# Altium PCB ServoShield.PcbDoc (part 3 of 3)
Units mm, origin at the board's own origin, x right, y up, seen from the top; angles counter-clockwise.
Board outline 82.5 x 82.5 mm, 2 copper layers (Top Layer, Bottom Layer); 43 components, 112 nets, 281 pads, 5423 vias.
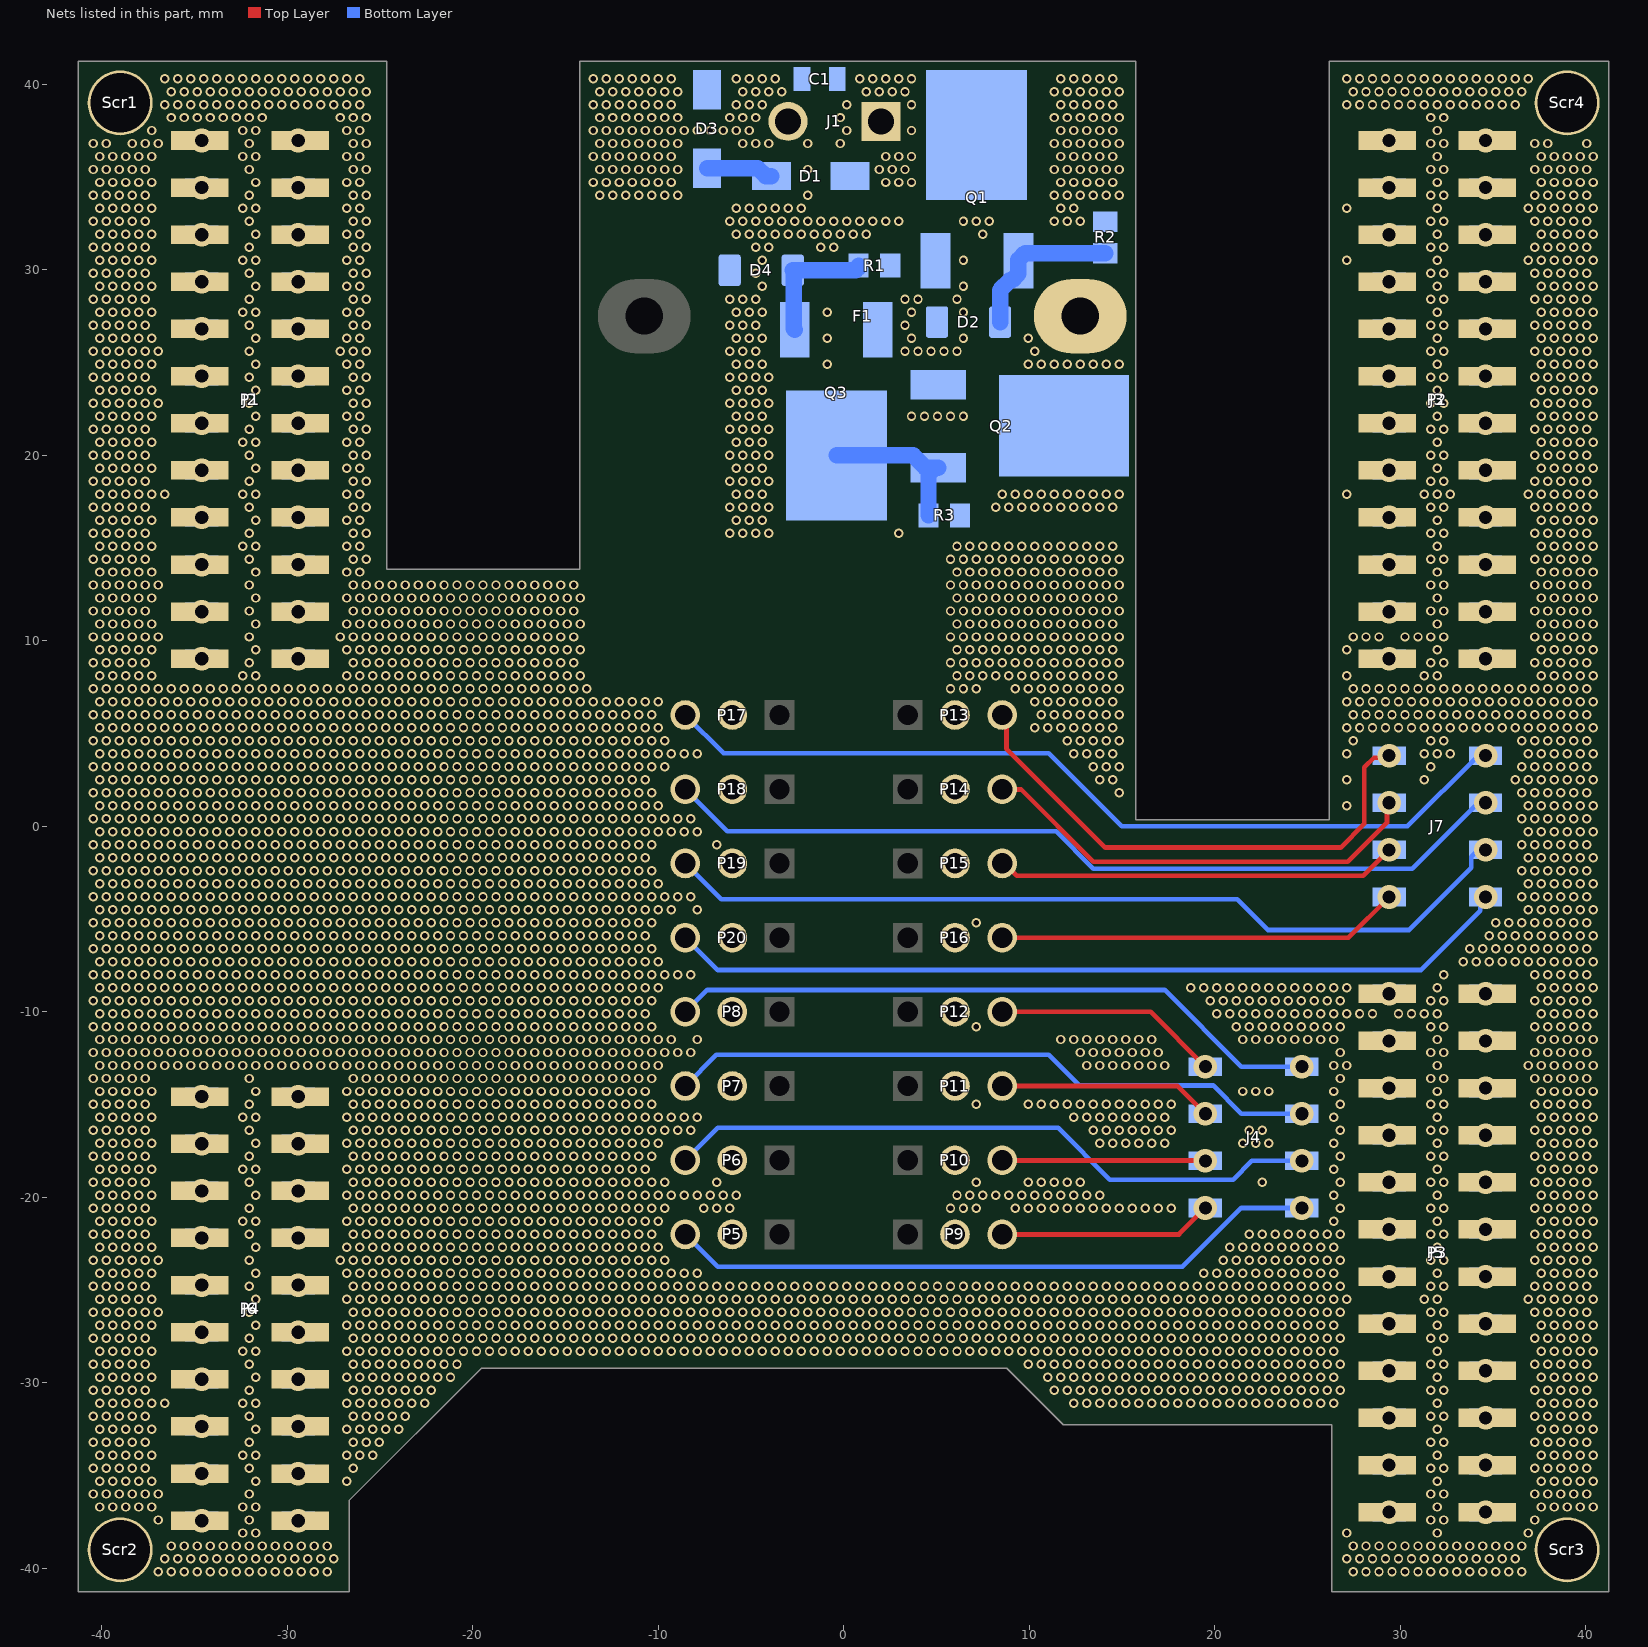
[diagram p3: the nets of this part, all layers, seen from the top]

## Via types
v1: diameter 0.508, hole 0.3, Top Layer to Bottom Layer, tented both sides, 5315 vias
v2: diameter 1.27, hole 0.711, Top Layer to Bottom Layer, 108 vias

## Nets (pads, with @x,y where several pads share a name; then routed paths per layer and width w, separated by ;. In a path a pad name is that pad's centre, name@x,y a point inside that pad or via, vN(x,y) a via of type N, cw(c..) or ccw(c..) an arc to the next point about the centre after c; other vN are vias at no path point) (continued)
GND: (continued)
  other v1: 29.207,5.307 29.907,5.307 30.607,5.307 31.307,5.307 32.007,5.307 32.707,5.307 33.407,5.307 34.107,5.307 34.807,5.307 35.507,5.307 36.207,5.307 36.907,5.307 37.607,5.307 38.307,5.307 39.007,5.307 39.707,5.307 40.407,5.307 -40.443,6.007 -39.743,6.007 -39.043,6.007 -38.343,6.007 -37.643,6.007 -36.943,6.007 -36.243,6.007 -35.543,6.007 -34.843,6.007 -34.143,6.007 -33.443,6.007 -32.743,6.007 -32.043,6.007 -31.343,6.007 -30.643,6.007 -29.943,6.007 -29.243,6.007 -28.543,6.007 -27.843,6.007 -27.143,6.007 -26.443,6.007 -25.743,6.007 -25.043,6.007 -24.343,6.007 -23.643,6.007 -22.943,6.007 -22.243,6.007 -21.543,6.007 -20.843,6.007 -20.143,6.007 -19.443,6.007 -18.743,6.007 -18.043,6.007 -17.343,6.007 -16.643,6.007 -15.943,6.007 -15.243,6.007 -14.543,6.007 -13.843,6.007 -13.143,6.007 -12.443,6.007 -11.743,6.007 -11.043,6.007 -10.343,6.007 10.657,6.007 11.357,6.007 12.057,6.007 12.757,6.007 13.457,6.007 14.157,6.007 14.857,6.007 27.457,6.007 28.157,6.007 28.857,6.007 29.557,6.007 30.257,6.007 30.957,6.007 31.657,6.007 32.357,6.007 33.057,6.007 33.757,6.007 34.457,6.007 35.157,6.007 35.857,6.007 36.557,6.007 37.257,6.007 37.957,6.007 38.657,6.007 39.357,6.007 40.057,6.007 -40.093,6.707 -39.393,6.707 -38.693,6.707 -37.993,6.707 -37.293,6.707 -36.593,6.707 -35.893,6.707 -35.193,6.707 -34.493,6.707 -33.793,6.707 -33.093,6.707 -32.393,6.707 -31.693,6.707 -30.993,6.707 -30.293,6.707 -29.593,6.707 -28.893,6.707 -28.193,6.707 -27.493,6.707 -26.793,6.707 -26.093,6.707 -25.393,6.707 -24.693,6.707 -23.993,6.707 -23.293,6.707 -22.593,6.707 -21.893,6.707 -21.193,6.707 -20.493,6.707 -19.793,6.707 -19.093,6.707 -18.393,6.707 -17.693,6.707 -16.993,6.707 -16.293,6.707 -15.593,6.707 -14.893,6.707 -14.193,6.707 -13.493,6.707 -12.793,6.707 -12.093,6.707 -11.393,6.707 -10.693,6.707 -9.993,6.707 10.307,6.707 11.007,6.707 11.707,6.707 12.407,6.707 13.107,6.707 13.807,6.707 14.507,6.707 27.107,6.707 27.807,6.707 28.507,6.707 29.207,6.707 29.907,6.707 30.607,6.707 31.307,6.707 32.007,6.707 32.707,6.707 33.407,6.707 34.107,6.707 34.807,6.707 35.507,6.707 36.207,6.707 36.907,6.707 37.607,6.707 38.307,6.707 39.007,6.707 39.707,6.707 40.407,6.707 -40.443,7.407 -39.743,7.407 -39.043,7.407 -38.343,7.407 -37.643,7.407 -36.943,7.407 -36.243,7.407 -35.543,7.407 -34.843,7.407 -34.143,7.407 -33.443,7.407 -32.743,7.407 -32.043,7.407 -31.343,7.407 -30.643,7.407 -29.943,7.407 -29.243,7.407 -28.543,7.407 -27.843,7.407 -27.143,7.407 -26.443,7.407 -25.743,7.407 -25.043,7.407 -24.343,7.407 -23.643,7.407 -22.943,7.407 -22.243,7.407 -21.543,7.407 -20.843,7.407 -20.143,7.407 -19.443,7.407 -18.743,7.407 -18.043,7.407 -17.343,7.407 -16.643,7.407 -15.943,7.407 -15.243,7.407 -14.543,7.407 -13.843,7.407 5.757,7.407 6.457,7.407 7.157,7.407 9.257,7.407 9.957,7.407 10.657,7.407 11.357,7.407 12.057,7.407 12.757,7.407 13.457,7.407 14.157,7.407 14.857,7.407 27.457,7.407 28.157,7.407 28.857,7.407 29.557,7.407 30.257,7.407 30.957,7.407 31.657,7.407 32.357,7.407 33.057,7.407 33.757,7.407 34.457,7.407 35.157,7.407 35.857,7.407 36.557,7.407 37.257,7.407 37.957,7.407 38.657,7.407 39.357,7.407 40.057,7.407 -40.093,8.107 -39.393,8.107 -38.693,8.107 -37.993,8.107 -37.293,8.107 -32.393,8.107 -31.693,8.107 -26.793,8.107 -26.093,8.107 -25.393,8.107 -24.693,8.107 -23.993,8.107 -23.293,8.107 -22.593,8.107 -21.893,8.107 -21.193,8.107 -20.493,8.107 -19.793,8.107 -19.093,8.107 -18.393,8.107 -17.693,8.107 -16.993,8.107 -16.293,8.107 -15.593,8.107 -14.893,8.107 -14.193,8.107 6.107,8.107 6.807,8.107 7.507,8.107 8.207,8.107 8.907,8.107 9.607,8.107 10.307,8.107 11.007,8.107 11.707,8.107 12.407,8.107 13.107,8.107 13.807,8.107 14.507,8.107 27.107,8.107 31.307,8.107 32.007,8.107 37.607,8.107 38.307,8.107 39.007,8.107 39.707,8.107 40.407,8.107 -40.443,8.807 -39.743,8.807 -39.043,8.807 -38.343,8.807 -37.643,8.807 -32.043,8.807 -26.443,8.807 -25.743,8.807 -25.043,8.807 -24.343,8.807 -23.643,8.807 -22.943,8.807 -22.243,8.807 -21.543,8.807 -20.843,8.807 -20.143,8.807 -19.443,8.807 -18.743,8.807 -18.043,8.807 -17.343,8.807 -16.643,8.807 -15.943,8.807 -15.243,8.807 -14.543,8.807 5.757,8.807 6.457,8.807 7.157,8.807 7.857,8.807 8.557,8.807 9.257,8.807 9.957,8.807 10.657,8.807 11.357,8.807 12.057,8.807 12.757,8.807 13.457,8.807 14.157,8.807 14.857,8.807 31.657,8.807 32.357,8.807 37.257,8.807 37.957,8.807 38.657,8.807 39.357,8.807 40.057,8.807 -40.093,9.507 -39.393,9.507 -38.693,9.507 -37.993,9.507 -37.293,9.507 -31.693,9.507 -26.793,9.507 -26.093,9.507 -25.393,9.507 -24.693,9.507 -23.993,9.507 -23.293,9.507 -22.593,9.507 -21.893,9.507 -21.193,9.507 -20.493,9.507 -19.793,9.507 -19.093,9.507 -18.393,9.507 -17.693,9.507 -16.993,9.507 -16.293,9.507 -15.593,9.507 -14.893,9.507 -14.193,9.507 6.107,9.507 6.807,9.507 7.507,9.507 8.207,9.507 8.907,9.507 9.607,9.507 10.307,9.507 11.007,9.507 11.707,9.507 12.407,9.507 13.107,9.507 13.807,9.507 14.507,9.507 27.107,9.507 32.007,9.507 37.607,9.507 38.307,9.507 39.007,9.507 39.707,9.507 40.407,9.507 -40.443,10.207 -39.743,10.207 -39.043,10.207 -38.343,10.207 -37.643,10.207 -36.943,10.207 -32.043,10.207 -27.143,10.207 -26.443,10.207 -25.743,10.207 -25.043,10.207 -24.343,10.207 -23.643,10.207 -22.943,10.207 -22.243,10.207 -21.543,10.207 -20.843,10.207 -20.143,10.207 -19.443,10.207 -18.743,10.207 -18.043,10.207 -17.343,10.207 -16.643,10.207 -15.943,10.207 -15.243,10.207 -14.543,10.207 5.757,10.207 6.457,10.207 7.157,10.207 7.857,10.207 8.557,10.207 9.257,10.207 9.957,10.207 10.657,10.207 11.357,10.207 12.057,10.207 12.757,10.207 13.457,10.207 14.157,10.207 14.857,10.207 27.457,10.207 28.157,10.207 28.857,10.207 30.257,10.207 30.957,10.207 31.657,10.207 32.357,10.207 37.257,10.207 37.957,10.207 38.657,10.207 39.357,10.207 40.057,10.207 -40.093,10.907 -39.393,10.907 -38.693,10.907 -37.993,10.907 -37.293,10.907 -31.693,10.907 -26.793,10.907 -26.093,10.907 -25.393,10.907 -24.693,10.907 -23.993,10.907 -23.293,10.907 -22.593,10.907 -21.893,10.907 -21.193,10.907 -20.493,10.907 -19.793,10.907 -19.093,10.907 -18.393,10.907 -17.693,10.907 -16.993,10.907 -16.293,10.907 -15.593,10.907 -14.893,10.907 -14.193,10.907 6.107,10.907 6.807,10.907 7.507,10.907 8.207,10.907 8.907,10.907 9.607,10.907 10.307,10.907 11.007,10.907 11.707,10.907 12.407,10.907 13.107,10.907 13.807,10.907 14.507,10.907 32.007,10.907 37.607,10.907 38.307,10.907 39.007,10.907 39.707,10.907 40.407,10.907 -40.443,11.607 -39.743,11.607 -39.043,11.607 -38.343,11.607 -37.643,11.607 -32.043,11.607 -26.443,11.607 -25.743,11.607 -25.043,11.607 -24.343,11.607 -23.643,11.607 -22.943,11.607 -22.243,11.607 -21.543,11.607 -20.843,11.607 -20.143,11.607 -19.443,11.607 -18.743,11.607 -18.043,11.607 -17.343,11.607 -16.643,11.607 -15.943,11.607 -15.243,11.607 -14.543,11.607 5.757,11.607 6.457,11.607 7.157,11.607 7.857,11.607 8.557,11.607 9.257,11.607 9.957,11.607 10.657,11.607 11.357,11.607 12.057,11.607 12.757,11.607 13.457,11.607 14.157,11.607 14.857,11.607 31.657,11.607 32.357,11.607 37.257,11.607 37.957,11.607 38.657,11.607 39.357,11.607 40.057,11.607 -40.093,12.307 -39.393,12.307 -38.693,12.307 -37.993,12.307 -37.293,12.307 -31.693,12.307 -26.793,12.307 -26.093,12.307 -25.393,12.307 -24.693,12.307 -23.993,12.307 -23.293,12.307 -22.593,12.307 -21.893,12.307 -21.193,12.307 -20.493,12.307 -19.793,12.307 -19.093,12.307 -18.393,12.307 -17.693,12.307 -16.993,12.307 -16.293,12.307 -15.593,12.307 -14.893,12.307 -14.193,12.307 6.107,12.307 6.807,12.307 7.507,12.307 8.207,12.307 8.907,12.307 9.607,12.307 10.307,12.307 11.007,12.307 11.707,12.307 12.407,12.307 13.107,12.307 13.807,12.307 14.507,12.307 32.007,12.307 37.607,12.307 38.307,12.307 39.007,12.307 39.707,12.307 40.407,12.307 -40.443,13.007 -39.743,13.007 -39.043,13.007 -38.343,13.007 -37.643,13.007 -36.943,13.007 -32.043,13.007 -26.443,13.007 -25.743,13.007 -25.043,13.007 -24.343,13.007 -23.643,13.007 -22.943,13.007 -22.243,13.007 -21.543,13.007 -20.843,13.007 -20.143,13.007 -19.443,13.007 -18.743,13.007 -18.043,13.007 -17.343,13.007 -16.643,13.007 -15.943,13.007 -15.243,13.007 -14.543,13.007 5.757,13.007 6.457,13.007 7.157,13.007 7.857,13.007 8.557,13.007 9.257,13.007 9.957,13.007 10.657,13.007 11.357,13.007 12.057,13.007 12.757,13.007 13.457,13.007 14.157,13.007 14.857,13.007 31.657,13.007 32.357,13.007 37.257,13.007 37.957,13.007 38.657,13.007 39.357,13.007 40.057,13.007 -40.093,13.707 -39.393,13.707 -38.693,13.707 -37.993,13.707 -37.293,13.707 -31.693,13.707 -26.793,13.707 -26.093,13.707 6.107,13.707 6.807,13.707 7.507,13.707 8.207,13.707 8.907,13.707 9.607,13.707 10.307,13.707 11.007,13.707 11.707,13.707 12.407,13.707 13.107,13.707 13.807,13.707 14.507,13.707 32.007,13.707 37.607,13.707 38.307,13.707 39.007,13.707 39.707,13.707 40.407,13.707 -40.443,14.407 -39.743,14.407 -39.043,14.407 -38.343,14.407 -37.643,14.407 -32.043,14.407 -26.443,14.407 -25.743,14.407 5.757,14.407 6.457,14.407 7.157,14.407 7.857,14.407 8.557,14.407 9.257,14.407 9.957,14.407 10.657,14.407 11.357,14.407 12.057,14.407 12.757,14.407 13.457,14.407 14.157,14.407 14.857,14.407 31.657,14.407 32.357,14.407 37.257,14.407 37.957,14.407 38.657,14.407 39.357,14.407 40.057,14.407 -40.093,15.107 -39.393,15.107 -38.693,15.107 -37.993,15.107 -37.293,15.107 -32.393,15.107 -31.693,15.107 -26.793,15.107 -26.093,15.107 6.107,15.107 6.807,15.107 7.507,15.107 8.207,15.107 8.907,15.107 9.607,15.107 10.307,15.107 11.007,15.107 11.707,15.107 12.407,15.107 13.107,15.107 13.807,15.107 14.507,15.107 32.007,15.107 37.607,15.107 38.307,15.107 39.007,15.107 39.707,15.107 40.407,15.107 -40.443,15.807 -39.743,15.807 -39.043,15.807 -38.343,15.807 -37.643,15.807 -32.043,15.807 -26.443,15.807 -25.743,15.807 -6.143,15.807 -5.443,15.807 -4.743,15.807 -4.043,15.807 2.957,15.807 31.657,15.807 32.357,15.807 37.257,15.807 37.957,15.807 38.657,15.807 39.357,15.807 40.057,15.807 -40.093,16.507 -39.393,16.507 -38.693,16.507 -37.993,16.507 -37.293,16.507 -31.693,16.507 -26.793,16.507 -26.093,16.507 -5.793,16.507 -5.093,16.507 -4.393,16.507 32.007,16.507 37.607,16.507 38.307,16.507 39.007,16.507 39.707,16.507 40.407,16.507 -40.443,17.207 -39.743,17.207 -39.043,17.207 -38.343,17.207 -37.643,17.207 -32.043,17.207 -26.443,17.207 -25.743,17.207 -6.143,17.207 -5.443,17.207 -4.743,17.207 -4.043,17.207 31.657,17.207 32.357,17.207 37.257,17.207 37.957,17.207 38.657,17.207 39.357,17.207 40.057,17.207 -40.093,17.907 -39.393,17.907 -38.693,17.907 -37.993,17.907 -37.293,17.907 -36.593,17.907 -32.393,17.907 -31.693,17.907 -26.793,17.907 -26.093,17.907 -5.793,17.907 -5.093,17.907 -4.393,17.907 27.107,17.907 31.307,17.907 32.007,17.907 32.707,17.907 36.907,17.907 37.607,17.907 38.307,17.907 39.007,17.907 39.707,17.907 40.407,17.907 -40.443,18.607 -39.743,18.607 -39.043,18.607 -38.343,18.607 -37.643,18.607 -32.043,18.607 -26.443,18.607 -25.743,18.607 -6.143,18.607 -5.443,18.607 -4.743,18.607 -4.043,18.607 31.657,18.607 32.357,18.607 37.257,18.607 37.957,18.607 38.657,18.607 39.357,18.607 40.057,18.607 -40.093,19.307 -39.393,19.307 -38.693,19.307 -37.993,19.307 -37.293,19.307 -31.693,19.307 -26.793,19.307 -26.093,19.307 -5.793,19.307 -5.093,19.307 -4.393,19.307 32.007,19.307 37.607,19.307 38.307,19.307 39.007,19.307 39.707,19.307 40.407,19.307 -40.443,20.007 -39.743,20.007 -39.043,20.007 -38.343,20.007 -37.643,20.007 -32.043,20.007 -26.443,20.007 -25.743,20.007 -6.143,20.007 -5.443,20.007 -4.743,20.007 -4.043,20.007 31.657,20.007 32.357,20.007 37.257,20.007 37.957,20.007 38.657,20.007 39.357,20.007 40.057,20.007 -40.093,20.707 -39.393,20.707 -38.693,20.707 -37.993,20.707 -37.293,20.707 -32.393,20.707 -31.693,20.707 -26.793,20.707 -26.093,20.707 -5.793,20.707 -5.093,20.707 -4.393,20.707 32.007,20.707 37.607,20.707 38.307,20.707 39.007,20.707 39.707,20.707 40.407,20.707 -40.443,21.407 -39.743,21.407 -39.043,21.407 -38.343,21.407 -37.643,21.407 -32.043,21.407 -26.443,21.407 -25.743,21.407 -6.143,21.407 -5.443,21.407 -4.743,21.407 -4.043,21.407 31.657,21.407 32.357,21.407 37.257,21.407 37.957,21.407 38.657,21.407 39.357,21.407 40.057,21.407 -40.093,22.107 -39.393,22.107 -38.693,22.107 -37.993,22.107 -37.293,22.107 -31.693,22.107 -26.793,22.107 -26.093,22.107 -5.793,22.107 -5.093,22.107 -4.393,22.107 32.007,22.107 37.607,22.107 38.307,22.107 39.007,22.107 39.707,22.107 40.407,22.107 -40.443,22.807 -39.743,22.807 -39.043,22.807 -38.343,22.807 -37.643,22.807 -36.943,22.807 -32.043,22.807 -26.443,22.807 -25.743,22.807 -6.143,22.807 -5.443,22.807 -4.743,22.807 -4.043,22.807 31.657,22.807 32.357,22.807 37.257,22.807 37.957,22.807 38.657,22.807 39.357,22.807 40.057,22.807 -40.093,23.507 -39.393,23.507 -38.693,23.507 -37.993,23.507 -37.293,23.507 -31.693,23.507 -26.793,23.507 -26.093,23.507 -5.793,23.507 -5.093,23.507 -4.393,23.507 32.007,23.507 37.607,23.507 38.307,23.507 39.007,23.507 39.707,23.507 40.407,23.507 -40.443,24.207 -39.743,24.207 -39.043,24.207 -38.343,24.207 -37.643,24.207 -32.043,24.207 -26.443,24.207 -25.743,24.207 -6.143,24.207 -5.443,24.207 -4.743,24.207 -4.043,24.207 31.657,24.207 32.357,24.207 37.257,24.207 37.957,24.207 38.657,24.207 39.357,24.207 40.057,24.207 -40.093,24.907 -39.393,24.907 -38.693,24.907 -37.993,24.907 -37.293,24.907 -31.693,24.907 -26.793,24.907 -26.093,24.907 -5.793,24.907 -5.093,24.907 -4.393,24.907 -0.893,24.907 32.007,24.907 37.607,24.907 38.307,24.907 39.007,24.907 39.707,24.907 40.407,24.907 -40.443,25.607 -39.743,25.607 -39.043,25.607 -38.343,25.607 -37.643,25.607 -36.943,25.607 -32.043,25.607 -27.143,25.607 -26.443,25.607 -25.743,25.607 -6.143,25.607 -5.443,25.607 -4.743,25.607 31.657,25.607 32.357,25.607 37.257,25.607 37.957,25.607 38.657,25.607 39.357,25.607 40.057,25.607 -40.093,26.307 -39.393,26.307 -38.693,26.307 -37.993,26.307 -37.293,26.307 -31.693,26.307 -26.793,26.307 -26.093,26.307 -5.793,26.307 -5.093,26.307 -4.393,26.307 -0.893,26.307 32.007,26.307 37.607,26.307 38.307,26.307 39.007,26.307 39.707,26.307 40.407,26.307 -40.443,27.007 -39.743,27.007 -39.043,27.007 -38.343,27.007 -37.643,27.007 -32.043,27.007 -26.443,27.007 -25.743,27.007 -6.143,27.007 -5.443,27.007 -4.743,27.007 31.657,27.007 32.357,27.007 37.257,27.007 37.957,27.007 38.657,27.007 39.357,27.007 40.057,27.007 -40.093,27.707 -39.393,27.707 -38.693,27.707 -37.993,27.707 -37.293,27.707 -32.393,27.707 -31.693,27.707 -26.793,27.707 -26.093,27.707 -5.793,27.707 -5.093,27.707 -4.393,27.707 -0.893,27.707 32.007,27.707 37.607,27.707 38.307,27.707 39.007,27.707 39.707,27.707 40.407,27.707 -40.443,28.407 -39.743,28.407 -39.043,28.407 -38.343,28.407 -37.643,28.407 -32.043,28.407 -26.443,28.407 -25.743,28.407 -6.143,28.407 -5.443,28.407 -4.743,28.407 31.657,28.407 32.357,28.407 37.257,28.407 37.957,28.407 38.657,28.407 39.357,28.407 40.057,28.407 -40.093,29.107 -39.393,29.107 -38.693,29.107 -37.993,29.107 -37.293,29.107 -31.693,29.107 -26.793,29.107 -26.093,29.107 -4.393,29.107 32.007,29.107 37.607,29.107 38.307,29.107 39.007,29.107 39.707,29.107 40.407,29.107 -40.443,29.807 -39.743,29.807 -39.043,29.807 -38.343,29.807 -37.643,29.807 -32.043,29.807 -26.443,29.807 -25.743,29.807 -4.743,29.807 31.657,29.807 32.357,29.807 37.257,29.807 37.957,29.807 38.657,29.807 39.357,29.807 40.057,29.807 -40.093,30.507 -39.393,30.507 -38.693,30.507 -37.993,30.507 -37.293,30.507 -32.393,30.507 -31.693,30.507 -26.793,30.507 -26.093,30.507 -4.393,30.507 27.107,30.507 32.007,30.507 36.907,30.507 37.607,30.507 38.307,30.507 39.007,30.507 39.707,30.507 40.407,30.507 -40.443,31.207 -39.743,31.207 -39.043,31.207 -38.343,31.207 -37.643,31.207 -32.043,31.207 -26.443,31.207 -25.743,31.207 -4.743,31.207 -4.043,31.207 -1.243,31.207 -0.543,31.207 31.657,31.207 32.357,31.207 37.257,31.207 37.957,31.207 38.657,31.207 39.357,31.207 40.057,31.207 -40.093,31.907 -39.393,31.907 -38.693,31.907 -37.993,31.907 -37.293,31.907 -31.693,31.907 -26.793,31.907 -26.093,31.907 -5.793,31.907 -5.093,31.907 -4.393,31.907 -3.693,31.907 -2.993,31.907 -2.293,31.907 -1.593,31.907 -0.893,31.907 -0.193,31.907 0.507,31.907 1.207,31.907 7.507,31.907 32.007,31.907 37.607,31.907 38.307,31.907 39.007,31.907 39.707,31.907 40.407,31.907 -40.443,32.607 -39.743,32.607 -39.043,32.607 -38.343,32.607 -37.643,32.607 -32.043,32.607 -26.443,32.607 -25.743,32.607 -6.143,32.607 -5.443,32.607 -4.743,32.607 -4.043,32.607 -3.343,32.607 -2.643,32.607 -1.943,32.607 -1.243,32.607 -0.543,32.607 0.157,32.607 0.857,32.607 1.557,32.607 2.257,32.607 2.957,32.607 6.457,32.607 7.157,32.607 7.857,32.607 11.357,32.607 12.057,32.607 12.757,32.607 31.657,32.607 32.357,32.607 37.257,32.607 37.957,32.607 38.657,32.607 39.357,32.607 40.057,32.607 -40.093,33.307 -39.393,33.307 -38.693,33.307 -37.993,33.307 -37.293,33.307 -32.393,33.307 -31.693,33.307 -26.793,33.307 -26.093,33.307 -5.793,33.307 -5.093,33.307 -4.393,33.307 -3.693,33.307 -2.993,33.307 -2.293,33.307 11.707,33.307 12.407,33.307 27.107,33.307 32.007,33.307 36.907,33.307 37.607,33.307 38.307,33.307 39.007,33.307 39.707,33.307 40.407,33.307 -40.443,34.007 -39.743,34.007 -39.043,34.007 -38.343,34.007 -37.643,34.007 -32.043,34.007 -26.443,34.007 -25.743,34.007 -13.143,34.007 -12.443,34.007 -11.743,34.007 -11.043,34.007 -10.343,34.007 -9.643,34.007 -8.943,34.007 -1.943,34.007 11.357,34.007 12.057,34.007 12.757,34.007 13.457,34.007 14.157,34.007 14.857,34.007 31.657,34.007 32.357,34.007 37.257,34.007 37.957,34.007 38.657,34.007 39.357,34.007 40.057,34.007 -40.093,34.707 -39.393,34.707 -38.693,34.707 -37.993,34.707 -37.293,34.707 -31.693,34.707 -26.793,34.707 -26.093,34.707 -13.493,34.707 -12.793,34.707 -12.093,34.707 -11.393,34.707 -10.693,34.707 -9.993,34.707 -9.293,34.707 11.707,34.707 12.407,34.707 13.107,34.707 13.807,34.707 14.507,34.707 32.007,34.707 37.607,34.707 38.307,34.707 39.007,34.707 39.707,34.707 40.407,34.707 -40.443,35.407 -39.743,35.407 -39.043,35.407 -38.343,35.407 -37.643,35.407 -32.043,35.407 -26.443,35.407 -25.743,35.407 -13.143,35.407 -12.443,35.407 -11.743,35.407 -11.043,35.407 -10.343,35.407 -9.643,35.407 -8.943,35.407 -1.943,35.407 11.357,35.407 12.057,35.407 12.757,35.407 13.457,35.407 14.157,35.407 14.857,35.407 31.657,35.407 32.357,35.407 37.257,35.407 37.957,35.407 38.657,35.407 39.357,35.407 40.057,35.407 -40.093,36.107 -39.393,36.107 -38.693,36.107 -37.993,36.107 -37.293,36.107 -32.393,36.107 -31.693,36.107 -26.793,36.107 -26.093,36.107 -13.493,36.107 -12.793,36.107 -12.093,36.107 -11.393,36.107 -10.693,36.107 -9.993,36.107 -9.293,36.107 11.707,36.107 12.407,36.107 13.107,36.107 13.807,36.107 14.507,36.107 32.007,36.107 37.607,36.107 38.307,36.107 39.007,36.107 39.707,36.107 40.407,36.107 -40.443,36.807 -39.743,36.807 -38.343,36.807 -37.643,36.807 -36.943,36.807 -32.043,36.807 -26.443,36.807 -25.743,36.807 -13.143,36.807 -12.443,36.807 -11.743,36.807 -11.043,36.807 -10.343,36.807 -9.643,36.807 -8.943,36.807 -5.443,36.807 -4.743,36.807 -4.043,36.807 -1.943,36.807 11.357,36.807 12.057,36.807 12.757,36.807 13.457,36.807 14.157,36.807 14.857,36.807 31.657,36.807 32.357,36.807 37.257,36.807 37.957,36.807 40.057,36.807 -37.293,37.507 -32.393,37.507 -31.693,37.507 -26.793,37.507 -26.093,37.507 -13.493,37.507 -12.793,37.507 -12.093,37.507 -11.393,37.507 -10.693,37.507 -9.993,37.507 -9.293,37.507 -8.593,37.507 -7.893,37.507 -7.193,37.507 -6.493,37.507 -5.793,37.507 -5.093,37.507 11.707,37.507 12.407,37.507 13.107,37.507 13.807,37.507 14.507,37.507 32.007,37.507 -36.243,38.207 -35.543,38.207 -34.843,38.207 -34.143,38.207 -33.443,38.207 -32.743,38.207 -32.043,38.207 -31.343,38.207 -27.143,38.207 -26.443,38.207 -25.743,38.207 -13.143,38.207 -12.443,38.207 -11.743,38.207 -11.043,38.207 -10.343,38.207 -9.643,38.207 -8.943,38.207 -6.143,38.207 -5.443,38.207 -4.743,38.207 11.357,38.207 12.057,38.207 12.757,38.207 13.457,38.207 14.157,38.207 14.857,38.207 31.657,38.207 32.357,38.207 -36.593,38.907 -35.893,38.907 -35.193,38.907 -34.493,38.907 -33.793,38.907 -33.093,38.907 -32.393,38.907 -31.693,38.907 -30.993,38.907 -30.293,38.907 -29.593,38.907 -28.893,38.907 -28.193,38.907 -27.493,38.907 -26.793,38.907 -26.093,38.907 -13.493,38.907 -12.793,38.907 -12.093,38.907 -11.393,38.907 -10.693,38.907 -9.993,38.907 -9.293,38.907 -5.793,38.907 -5.093,38.907 -4.393,38.907 11.707,38.907 12.407,38.907 13.107,38.907 13.807,38.907 14.507,38.907 27.107,38.907 27.807,38.907 28.507,38.907 29.207,38.907 29.907,38.907 30.607,38.907 31.307,38.907 32.007,38.907 32.707,38.907 33.407,38.907 34.107,38.907 34.807,38.907 35.507,38.907 36.207,38.907 -36.243,39.607 -35.543,39.607 -34.843,39.607 -34.143,39.607 -33.443,39.607 -32.743,39.607 -32.043,39.607 -31.343,39.607 -30.643,39.607 -29.943,39.607 -29.243,39.607 -28.543,39.607 -27.843,39.607 -27.143,39.607 -26.443,39.607 -25.743,39.607 -13.143,39.607 -12.443,39.607 -11.743,39.607 -11.043,39.607 -10.343,39.607 -9.643,39.607 -8.943,39.607 -5.443,39.607 -4.743,39.607 -4.043,39.607 -3.343,39.607 11.357,39.607 12.057,39.607 12.757,39.607 13.457,39.607 14.157,39.607 14.857,39.607 27.457,39.607 28.157,39.607 28.857,39.607 29.557,39.607 30.257,39.607 30.957,39.607 31.657,39.607 32.357,39.607 33.057,39.607 33.757,39.607 34.457,39.607 35.157,39.607 35.857,39.607 36.557,39.607 -36.593,40.307 -35.893,40.307 -35.193,40.307 -34.493,40.307 -33.793,40.307 -33.093,40.307 -32.393,40.307 -31.693,40.307 -30.993,40.307 -30.293,40.307 -29.593,40.307 -28.893,40.307 -28.193,40.307 -27.493,40.307 -26.793,40.307 -26.093,40.307 -13.493,40.307 -12.793,40.307 -12.093,40.307 -11.393,40.307 -10.693,40.307 -9.993,40.307 -9.293,40.307 -5.793,40.307 -5.093,40.307 -4.393,40.307 -3.693,40.307 11.707,40.307 12.407,40.307 13.107,40.307 13.807,40.307 14.507,40.307 27.107,40.307 27.807,40.307 28.507,40.307 29.207,40.307 29.907,40.307 30.607,40.307 31.307,40.307 32.007,40.307 32.707,40.307 33.407,40.307 34.107,40.307 34.807,40.307 35.507,40.307 36.207,40.307 36.907,40.307
  other v2: -34.6,-37.43 -29.4,-37.43 29.4,-9.03 29.4,9.03 -34.6,36.97
HD_3V3: J5.2 P3.1
  other v2: 34.6,-36.97
HD_3V3-1: J5.1 P3.2
  other v2: 29.4,-36.97
HD_5V-1: J2.24 P1.23
  other v2: -29.4,36.97
HD_5V-2: J6.1 P4.2
  other v2: -29.4,-14.57
HD_Vin: J3.1 P2.2
  other v2: 34.6,36.97
NetD1_A: D1.A D3.A | length 3.6
  Bottom Layer w0.889: D3.A@-7.366,35.477 -4.628,35.477 -4.203,35.052 D1.A@-3.893,35.052
NetD2_A: D2.A Q1.1 R2.2 | length 8.7
  Bottom Layer w0.889: D2.A@8.431,27.178 8.431,28.905 8.952,29.426 9.068,29.426 9.423,29.781 9.423,30.544 9.779,30.9 R2.2@14.097,30.9
NetD2_K: D2.K Q1.3 Q2.3 Q3.3 R1.2
  other v1: 3.657,22.107 4.357,22.107 5.057,22.107 5.757,22.107 6.457,22.107 3.307,25.607 4.007,25.607 4.707,25.607 5.407,25.607 6.107,25.607 3.657,26.307 6.457,26.307 3.307,27.007 3.657,27.707 6.457,27.707 3.307,28.407 4.007,28.407 6.107,28.407 6.457,29.107 6.457,30.507
NetD4_K: D4.K Q3.1 R1.1 | length 7
  Bottom Layer w0.889: Q3.1@-2.642,26.772 -2.693,26.823 -2.693,29.92 D4.K@-2.745,29.972 0.647,29.972 0.801,30.126 R1.1@0.801,30.226
NetF1_0: F1.0 Q2.4
  other v1: 8.207,17.207 8.907,17.207 9.607,17.207 10.307,17.207 11.007,17.207 11.707,17.207 12.407,17.207 13.107,17.207 13.807,17.207 14.507,17.207 8.557,17.907 9.257,17.907 9.957,17.907 10.657,17.907 11.357,17.907 12.057,17.907 12.757,17.907 13.457,17.907 14.157,17.907 14.857,17.907 9.957,24.907 10.657,24.907 11.357,24.907 12.057,24.907 12.757,24.907 13.457,24.907 14.157,24.907 14.857,24.907 10.307,25.607 9.957,26.307
NetQ2_1: Q2.1 Q3.4 R3.2 | length 8.7
  Bottom Layer w0.889: Q3.4@-0.381,19.991 3.745,19.991 4.407,19.329 Q2.1@5.105,19.329 4.928,19.329 4.572,18.974 R3.2@4.572,16.764
PA0: J4.2 P5.3 | length 35.3
  Bottom Layer w0.254: P5.3@-8.54,-22 -6.791,-23.749 18.262,-23.749 21.437,-20.574 v2(24.698,-20.574)
PA0-p: J6.16 P4.15
  other v2: -34.6,-32.35
PA1: J4.1 P9.3 | length 11.5
  Top Layer w0.254: P9.3@8.54,-22 18.072,-22 v2(19.498,-20.574)
PA1-p: J6.17 P4.18
  other v2: -29.4,-34.89
PA2: J4.4 P6.3 | length 35.5
  Bottom Layer w0.254: P6.3@-8.54,-18 -6.796,-16.256 11.557,-16.256 14.351,-19.05 20.993,-19.05 22.009,-18.034 v2(24.698,-18.034)
PA2-p: J6.18 P4.17
  other v2: -34.6,-34.89
PA3: J4.3 P10.3 | length 11
  Top Layer w0.254: P10.3@8.54,-18 8.557,-18.017 19.481,-18.017 v2(19.498,-18.034)
PA3-p: J5.4 P3.3
  other v2: 34.6,-34.43
PA4: J5.3 P3.4
  other v2: 29.4,-34.43
PA5: J5.6 P3.5
  other v2: 34.6,-31.89
PA6: J5.5 P3.6
  other v2: 29.4,-31.89
PA7: J5.8 P3.7
  other v2: 34.6,-29.35
PA8: J3.7 P2.8
  other v2: 34.6,29.35
PA9: J3.6 P2.5
  other v2: 29.4,31.89
PA10: J3.5 P2.6
  other v2: 34.6,31.89
PA11: J3.4 P2.3
  other v2: 29.4,34.43
PA12: J3.3 P2.4
  other v2: 34.6,34.43
PA13: J3.2 P2.1
  other v2: 29.4,36.97
PA14: J2.22 P1.21
  other v2: -29.4,34.43
PA15: J2.21 P1.22
  other v2: -34.6,34.43
PB0: J5.12 P3.11
  other v2: 34.6,-24.27
PB1: J5.9 P3.10
  other v2: 29.4,-26.81
PB2: J5.14 P3.13
  other v2: 34.6,-21.73
PB3: J2.9 P1.10
  other v2: -34.6,19.19
PB4: J2.8 P1.7
  other v2: -29.4,16.65
PB5: J2.7 P1.8
  other v2: -34.6,16.65
PB6: J2.6 P1.5
  other v2: -29.4,14.11
PB7: J2.5 P1.6
  other v2: -34.6,14.11
PB8: J2.4 P1.3
  other v2: -29.4,11.57
PB9: J2.3 P1.4
  other v2: -34.6,11.57
PB10: J5.24 P3.23
  other v2: 34.6,-9.03
PB11: J5.21 P3.22
  other v2: 29.4,-11.57
PB12: J3.23 P2.24
  other v2: 34.6,9.03
PB13: J3.22 P2.21
  other v2: 29.4,11.57
PB14: J3.21 P2.22
  other v2: 34.6,11.57
PB15: J3.20 P2.19
  other v2: 29.4,14.11
PC0: J6.12 P4.11
  other v2: -34.6,-27.27
PC1: J6.13 P4.14
  other v2: -29.4,-29.81
PC2: J6.14 P4.13
  other v2: -34.6,-29.81
PC3: J6.15 P4.16
  other v2: -29.4,-32.35
PC4: J5.7 P3.8
  other v2: 29.4,-29.35
PC5: J5.10 P3.9
  other v2: 34.6,-26.81
PC6: J7.3 P18.3 | length 46.4
  Bottom Layer w0.254: P18.3@-8.54,2 -6.268,-0.272 11.448,-0.272 13.462,-2.286 30.644,-2.286 34.2,1.27 v2(34.6,1.27)
PC6-p: J3.11 P2.12
  other v2: 34.6,24.27
PC7: J7.4 P14.3 | length 24.4
  Top Layer w0.254: P14.3@8.54,2 8.555,1.985 9.572,1.985 13.462,-1.905 27.178,-1.905 29.285,0.202 29.285,1.155 v2(29.4,1.27)
PC7-p: J3.10 P2.9
  other v2: 29.4,26.81
PC8: J7.1 P17.3 | length 47.2
  Bottom Layer w0.254: P17.3@-8.54,6 -6.477,3.937 11.049,3.937 14.986,0 30.39,0 34.2,3.81 v2(34.6,3.81)
PC8-p: J3.9 P2.10
  other v2: 34.6,26.81
PC9: J7.2 P13.3 | length 28.6
  Top Layer w0.254: P13.3@8.54,6 8.773,5.767 8.773,4.181 14.097,-1.143 26.797,-1.143 28.067,0.127 28.067,3.175 28.587,3.695 29.285,3.695 v2(29.4,3.81)
PC9-p: J3.8 P2.7
  other v2: 29.4,29.35
PC10: J2.20 P1.19
  other v2: -29.4,31.89
PC11: J2.19 P1.20
  other v2: -34.6,31.89
PC12: J2.18 P1.17
  other v2: -29.4,29.35
PC13: J6.7 P4.8
  other v2: -29.4,-22.19
PC14: J6.8 P4.7
  other v2: -34.6,-22.19
PC15: J6.9 P4.10
  other v2: -29.4,-24.73
PD0: J2.17 P1.18
  other v2: -34.6,29.35
PD1: J2.16 P1.15
  other v2: -29.4,26.81
PD2: J2.15 P1.16
  other v2: -34.6,26.81
PD3: J2.14 P1.13
  other v2: -29.4,24.27
PD4: J2.13 P1.14
  other v2: -34.6,24.27
PD5: J2.12 P1.11
  other v2: -29.4,21.73
PD6: J2.11 P1.12
  other v2: -34.6,21.73
PD7: J2.10 P1.9
  other v2: -29.4,19.19
PD8: J3.19 P2.20
  other v2: 34.6,14.11
PD9: J3.18 P2.17
  other v2: 29.4,16.65
PD10: J3.17 P2.18
  other v2: 34.6,16.65
PD11: J3.16 P2.15
  other v2: 29.4,19.19
PD12: J7.7 P20.3 | length 45.8
  Bottom Layer w0.254: P20.3@-8.54,-6 -6.793,-7.747 31.115,-7.747 34.32,-4.542 34.32,-4.09 v2(34.6,-3.81)
PD12-p: J3.15 P2.16
  other v2: 34.6,19.19
PD13: J7.8 P16.3 | length 21.8
  Top Layer w0.254: P16.3@8.54,-6 27.21,-6 v2(29.4,-3.81)
PD13-p: J3.14 P2.13
  other v2: 29.4,21.73
PD14: J7.5 P19.3 | length 46.8
  Bottom Layer w0.254: P19.3@-8.54,-2 -6.603,-3.937 21.209,-3.937 22.86,-5.588 30.48,-5.588 33.827,-2.241 33.827,-1.643 34.2,-1.27 v2(34.6,-1.27)
PD14-p: J3.13 P2.14
  other v2: 34.6,21.73
PD15: J7.6 P15.3 | length 21.7
  Top Layer w0.254: P15.3@8.54,-2 8.666,-2 9.333,-2.667 28.003,-2.667 v2(29.4,-1.27)
PD15-p: J3.12 P2.11
  other v2: 29.4,24.27
PE0: J2.2 P1.1
  other v2: -29.4,9.03
PE1: J2.1 P1.2
  other v2: -34.6,9.03
PE2: J6.2 P4.1
  other v2: -34.6,-14.57
PE3: J6.3 P4.4
  other v2: -29.4,-17.11
PE4: J6.4 P4.3
  other v2: -34.6,-17.11
PE5: J6.5 P4.6
  other v2: -29.4,-19.65
PE6: J6.6 P4.5
  other v2: -34.6,-19.65
PE7: J5.11 P3.12
  other v2: 29.4,-24.27
PE8: J5.16 P3.15
  other v2: 34.6,-19.19
PE9: J4.6 P7.3 | length 35.2
  Bottom Layer w0.254: P7.3@-8.54,-14 -6.859,-12.319 11.049,-12.319 12.7,-13.97 19.913,-13.97 21.437,-15.494 v2(24.698,-15.494)
PE9-p: J5.13 P3.14
  other v2: 29.4,-21.73
PE10: J5.18 P3.17
  other v2: 34.6,-16.65
PE11: J4.5 P11.3 | length 11.6
  Top Layer w0.254: P11.3@8.54,-14 18.004,-14 v2(19.498,-15.494)
PE11-p: J5.15 P3.16
  other v2: 29.4,-19.19
PE12: J5.20 P3.19
  other v2: 34.6,-14.11
PE13: J4.8 P8.3 | length 35.4
  Bottom Layer w0.254: P8.3@-8.54,-10 -7.359,-8.819 17.302,-8.819 21.437,-12.954 v2(24.698,-12.954)
PE13-p: J5.17 P3.18
  other v2: 29.4,-16.65
PE14: J4.7 P12.3 | length 12.2
  Top Layer w0.254: P12.3@8.54,-10 16.544,-10 v2(19.498,-12.954)
PE14-p: J5.22 P3.21
  other v2: 34.6,-11.57
PE15: J5.19 P3.20
  other v2: 29.4,-14.11
PH0: J6.10 P4.9
  other v2: -34.6,-24.73
PH1: J6.11 P4.12
  other v2: -29.4,-27.27
VDIn: C1.2 D1.C J1.1 Q1.4
  other v1: 2.257,34.707 2.957,34.707 3.657,34.707 1.907,35.407 2.607,35.407 3.307,35.407 2.257,36.107 2.957,36.107 3.657,36.107 -0.193,36.807 0.157,37.507 3.657,37.507 -0.193,38.207 0.157,38.907 3.657,38.907 1.207,39.607 1.907,39.607 2.607,39.607 3.307,39.607 0.857,40.307 1.557,40.307 2.257,40.307 2.957,40.307 3.657,40.307

## Polygon pours and split planes (outlines as drawn)
GND on Top Layer "GND_L01_P029" (solid, remove dead copper, pour order 29): -26.643,-41.25 -26.643,-36.322 -19.531,-29.21 8.79,-29.21 11.838,-32.258 26.316,-32.258 26.316,-41.25 41.25,-41.25 41.25,41.25 26.162,41.25 26.162,0.356 15.748,0.356 15.748,41.25 -14.224,41.25 -14.224,13.848 -24.638,13.848 -24.638,41.25 -41.25,41.25 -41.25,-41.25
NetF1_0 on Top Layer "NETF1_0_L01_P024" (solid, pour order 24): 9.398,28.448 15.748,28.448 15.748,16.256 7.493,16.256 7.493,25.273 9.398,25.273
VDIn on Top Layer "VDIN_L01_P022" (solid, pour order 22): 10.541,33.528 3.048,33.528 -0.889,33.528 -0.889,36.576 -0.889,41.148 10.541,41.148
NetD2_K on Top Layer "NETD2_K_L01_P021" (solid, pour order 21): 1.651,29.464 1.651,31.242 3.302,31.242 7.112,31.242 7.112,20.955 2.54,20.955 2.54,23.876 0.127,23.876 0.127,29.464
5V on Top Layer "5V_L01_P019" (solid, pour order 19): -13.335,33.02 -6.985,33.02 -6.985,14.732 4.826,14.732 4.826,-23.368 -4.699,-23.368 -4.699,8.128 -13.335,8.128
GND on Bottom Layer "GND_L02_P030" (solid, remove dead copper, pour order 30): -26.643,-41.25 -26.643,-36.322 -19.531,-29.21 8.79,-29.21 11.838,-32.258 26.316,-32.258 26.316,-41.25 41.25,-41.25 41.25,41.25 26.162,41.25 26.162,0.356 15.748,0.356 15.748,41.25 -14.224,41.25 -14.224,13.848 -24.638,13.848 -24.638,41.25 -41.25,41.25 -41.25,-41.25
NetD2_K on Bottom Layer "NETD2_K_L02_P017" (solid, pour order 17): 1.651,29.464 1.651,31.242 3.302,31.242 7.112,31.242 7.112,20.955 2.54,20.955 2.54,23.876 0.127,23.876 0.127,29.464
VDIn on Bottom Layer "VDIN_L02_P016" (solid, pour order 16): 10.541,33.528 3.048,33.528 -0.889,33.528 -0.889,36.576 -0.889,41.148 10.541,41.148
5V on Bottom Layer "5V_L02_P010" (solid, pour order 10): -13.335,33.02 -6.985,33.02 -6.985,14.732 4.826,14.732 4.826,-23.368 -4.699,-23.368 -4.699,8.128 -13.335,8.128
NetF1_0 on Bottom Layer "NETF1_0_L02_P014" (solid, pour order 14): 9.398,28.448 15.748,28.448 15.748,16.256 7.493,16.256 7.493,25.273 9.398,25.273
NetF1_0 on Bottom Solder "NETF1_0_L01_P013" (solid, pour order 13): 9.398,28.448 15.748,28.448 15.748,16.256 7.493,16.256 7.493,25.273 9.398,25.273
VDIn on Bottom Solder "VDIN_L01_P012" (solid, pour order 12): 10.541,33.528 3.048,33.528 -0.889,33.528 -0.889,36.576 -0.889,41.148 10.541,41.148
NetD2_K on Bottom Solder "NETD2_K_L01_P015" (solid, pour order 15): 1.651,29.464 1.651,31.242 3.302,31.242 7.112,31.242 7.112,20.955 2.54,20.955 2.54,23.876 0.127,23.876 0.127,29.464
5V on Bottom Solder "5V_L01_P009" (solid, pour order 9): -13.335,33.02 -6.985,33.02 -6.985,14.732 4.826,14.732 4.826,-23.368 -4.699,-23.368 -4.699,8.255 -13.335,8.255
5V on Top Solder "5V_L01_P018" (solid, pour order 18): -13.335,33.02 -6.985,33.02 -6.985,14.732 4.826,14.732 4.826,-23.368 -4.699,-23.368 -4.699,8.255 -13.335,8.255
NetD2_K on Top Solder "NETD2_K_L01_P020" (solid, pour order 20): 1.651,29.464 1.651,31.242 3.302,31.242 7.112,31.242 7.112,20.955 2.54,20.955 2.54,23.876 0.127,23.876 0.127,29.464
VDIn on Top Solder "VDIN_L01_P023" (solid, pour order 23): 10.541,33.528 3.048,33.528 -0.889,33.528 -0.889,36.576 -0.889,41.148 10.541,41.148
NetF1_0 on Top Solder "NETF1_0_L01_P026" (solid, pour order 26): 9.398,28.448 15.748,28.448 15.748,16.256 7.493,16.256 7.493,25.273 9.398,25.273
GND on Top Solder "GND_L01_P007" (solid, remove dead copper, pour order 7): -41.148,41.148 41.148,41.148 41.148,-41.148 -41.148,-41.148

## Silkscreen, mask and mechanical layers (free items; w line width, h text height)
Top Overlay:
  drawing of 143 lines, arcs and shapes, not listed
  text "GND" at -41.05,36.085 h1
  text "5V" at -38.891,36.085 h1
  text "A13" at 36.801,35.831 h1
  text "VIN" at 38.96,35.831 h1
  text "GND" at -14.017,34.068 h1
  text "VIN" at -9.993,34.068 h1
  text "A15" at -41.021,33.528 h1
  text "A14" at -38.862,33.528 h1
  text "A11" at 36.83,33.528 h1
  text "A12" at 38.989,33.528 h1
  text "C11" at -41.084,30.988 h1
  text "C10" at -38.798,30.988 h1
  text "A9" at 36.767,30.988 h1
  text "A10" at 39.052,30.988 h1
  text "D0" at -41.084,28.448 h1
  text "C12" at -38.798,28.448 h1
  text "C9" at 36.767,28.448 h1
  text "A8" at 39.052,28.448 h1
  text "D2" at -41.084,25.908 h1
  text "D1" at -38.798,25.908 h1
  text "C7" at 36.767,25.908 h1
  text "C8" at 39.052,25.908 h1
  text "D4" at -41.084,23.368 h1
  text "D3" at -38.798,23.368 h1
  text "D15" at 36.767,23.368 h1
  text "C6" at 39.052,23.368 h1
  text "D6" at -41.084,20.955 h1
  text "D5" at -38.798,20.955 h1
  text "D13" at 36.767,20.955 h1
  text "D14" at 39.052,20.955 h1
  text "B3" at -41.084,18.288 h1
  text "D7" at -38.798,18.288 h1
  text "D11" at 36.767,18.288 h1
  text "D12" at 39.052,18.288 h1
  text "Solder for increase Imax" at -4.166,15.871 h1
  text "B5" at -41.084,15.748 h1
  text "B4" at -38.798,15.748 h1
  text "D9" at 36.767,15.748 h1
  text "D10" at 39.052,15.748 h1
  text "B7" at -41.084,13.208 h1
  text "B6" at -38.798,13.208 h1
  text "B15" at 36.767,13.208 h1
  text "D8" at 39.052,13.208 h1
  text "B9" at -41.084,10.668 h1
  text "B8" at -38.798,10.668 h1
  text "B13" at 36.767,10.668 h1
  text "B14" at 39.052,10.668 h1
  text "E1" at -41.084,8.255 h1
  text "GND" at 36.767,8.255 h1
  text "E0" at -38.798,8.128 h1
  text "B12" at 39.052,8.128 h1
  text "C8" at -13.143,4.655 h1.52
  text "C9" at 9.96,4.655 h1.52
  text "QR1" at -34.719,0.764 h1.52
  text "C6" at -13.143,0.655 h1.52
  text "C7" at 9.96,0.655 h1.52
  text "D14" at -13.191,-3.345 h1.52
  text "D15" at 9.96,-3.345 h1.52
  text "D12" at -13.143,-7.345 h1.52
  text "D13" at 9.96,-7.345 h1.52
  text "QR2" at -34.609,-7.999 h1.52
  text "GND" at 36.674,-9.889 h1
  text "B10" at 38.833,-9.889 h1
  text "E14" at 9.96,-11.345 h1.52
  text "E13" at -13.176,-11.383 h1.52
  text "B11" at 36.703,-12.446 h1
  text "E14" at 38.862,-12.446 h1
  text "E15" at 36.639,-14.986 h1
  text "E12" at 38.925,-14.986 h1
  text "E2" at -40.831,-15.24 h1
  text "5V" at -38.544,-15.24 h1
  text "E9" at -13.143,-15.345 h1.52
  text "E11" at 9.96,-15.345 h1.52
  text "E13" at 36.639,-17.526 h1
  text "E10" at 38.925,-17.526 h1
  text "E4" at -40.831,-17.907 h1
  text "E3" at -38.544,-17.907 h1
  text "A2" at -13.143,-19.345 h1.52
  text "A3" at 9.96,-19.345 h1.52
  text "E11" at 36.639,-20.066 h1
  text "E8" at 38.925,-20.066 h1
  text "E6" at -40.831,-20.447 h1
  text "E5" at -38.544,-20.447 h1
  text "E9" at 36.639,-22.606 h1
  text "B2" at 38.925,-22.606 h1
  text "Robot Arm Shield V1" at -17.666,-22.674 h3 r90
  text "C14" at -40.831,-22.987 h1
  text "C13" at -38.544,-22.987 h1
  text "A0" at -13.143,-23.345 h1.52
  text "A1" at 9.96,-23.345 h1.52
  text "E7" at 36.639,-25.019 h1
  text "B0" at 38.925,-25.019 h1
  text "S" at 7.307,-25.435 h1.52
  text "S" at -9.96,-25.447 h1.52
  text "G" at -7.239,-25.447 h1.52
  text "5V" at -4.826,-25.447 h1.52
  text "G" at 4.953,-25.447 h1.52
  text "H0" at -40.831,-25.527 h1
  text "C15" at -38.544,-25.527 h1
  text "5V" at 2.04,-25.527 h1.52
  text "B1" at 36.639,-27.686 h1
  text "C5" at 38.925,-27.686 h1
  text "C0" at -40.831,-28.067 h1
  text "H1" at -38.544,-28.067 h1
  text "C4" at 36.639,-30.226 h1
  text "A7" at 38.925,-30.226 h1
  text "C2" at -40.831,-30.607 h1
  text "C1" at -38.544,-30.607 h1
  text "A6" at 36.639,-32.766 h1
  text "A5" at 38.925,-32.766 h1
  text "A0" at -40.831,-33.147 h1
  text "C3" at -38.544,-33.147 h1
  text "A4" at 36.639,-35.306 h1
  text "A3" at 38.925,-35.306 h1
  text "A2" at -40.831,-35.433 h1
  text "A1" at -38.544,-35.433 h1
  text "GND" at -40.884,-37.156 h1
  text "GND" at -38.484,-37.156 h1
  text "3V3" at 36.639,-37.719 h1
  text "3V3" at 38.925,-37.846 h1
Bottom Overlay:
  lines w0.127: -24.511,2.159 -18.542,2.159 ; -18.415,-12.192 -18.415,8.128 ; -24.511,-12.192 -24.511,8.128 -16.383,8.128 -16.383,-12.192 -24.511,-12.192
  text "QR" at -22.227,3.81 h2.5 r270
  text "Technical Information" at -18.355,-11.938 h1.5 r270
  text "- Imax : < 30A (for safe) / - Reverse polarity protect  / - Overvoltage protect / - Overcurrent protect / - Scan QR for more information" at -24.47,-12.065 h1 r270
Top Solder:
  text "RYA" at -20.574,-21.59 h4 r90
Drill Guide:
  the board outline again, w0.254

## Text inside footprints (layer, text, board x,y; h text height)
J2: Bottom Overlay "24" at -29.9,38.9 h1.02 r270; Bottom Overlay "23" at -35.1,39 h1.02 r270; Bottom Overlay "1" at -35.1,6.8 h1.02 r270; Bottom Overlay "2" at -29.9,6.4 h1.02 r270
J3: Bottom Overlay "24" at 29.9,7.1 h1.02 r90; Bottom Overlay "23" at 35.1,7 h1.02 r90; Bottom Overlay "1" at 35.1,39.2 h1.02 r90; Bottom Overlay "2" at 29.9,39.6 h1.02 r90
J4: Bottom Overlay "8" at 24.198,-11.024 h1.02 r270; Bottom Overlay "7" at 18.998,-10.924 h1.02 r270; Bottom Overlay "1" at 18.998,-22.804 h1.02 r270; Bottom Overlay "2" at 24.198,-23.204 h1.02 r270
J5: Bottom Overlay "24" at 34.1,-7.1 h1.02 r270; Bottom Overlay "23" at 28.9,-7 h1.02 r270; Bottom Overlay "1" at 28.9,-39.2 h1.02 r270; Bottom Overlay "2" at 34.1,-39.6 h1.02 r270
J6: Bottom Overlay "20" at -34.1,-39.36 h1.02 r90; Bottom Overlay "19" at -28.9,-39.46 h1.02 r90; Bottom Overlay "1" at -28.9,-12.34 h1.02 r90; Bottom Overlay "2" at -34.1,-11.94 h1.02 r90
J7: Bottom Overlay "8" at 29.9,-5.74 h1.02 r90; Bottom Overlay "7" at 35.1,-5.84 h1.02 r90; Bottom Overlay "1" at 35.1,6.04 h1.02 r90; Bottom Overlay "2" at 29.9,6.44 h1.02 r90
P1: Top Overlay "1" at -28,7.8 h1.02 r90; Top Overlay "2" at -35,7.5 h1.02 r90; Top Overlay "23" at -28,37.9 h1.02 r90; Top Overlay "24" at -35,37.9 h1.02 r90
P2: Top Overlay "1" at 28,38.2 h1.02 r270; Top Overlay "2" at 35,38.5 h1.02 r270; Top Overlay "23" at 28,8.1 h1.02 r270; Top Overlay "24" at 35,8.1 h1.02 r270
P3: Top Overlay "1" at 36,-38.2 h1.02 r90; Top Overlay "2" at 29,-38.5 h1.02 r90; Top Overlay "23" at 36,-8.1 h1.02 r90; Top Overlay "24" at 29,-8.1 h1.02 r90
P4: Top Overlay "20" at -29,-38.46 h1.02 r270; Top Overlay "19" at -36,-38.46 h1.02 r270; Top Overlay "1" at -36,-13.24 h1.02 r270; Top Overlay "2" at -29,-12.94 h1.02 r270
Q1: Mechanical 13 "1" at 9.576,32.88 h0.61; Mechanical 13 "2" at 7.366,32.88 h0.61; Mechanical 13 "3" at 5.182,32.88 h0.61; Mechanical 13 "4" at 7.493,37.249 h0.61
Q2: Mechanical 13 "1" at 7.506,19.177 h0.61 r270; Mechanical 13 "2" at 7.506,21.387 h0.61 r270; Mechanical 13 "3" at 7.506,23.571 h0.61 r270; Mechanical 13 "4" at 11.874,21.26 h0.61 r270
Q3: Mechanical 13 "1" at -2.794,24.371 h0.61 r180; Mechanical 13 "2" at -0.584,24.371 h0.61 r180; Mechanical 13 "3" at 1.6,24.371 h0.61 r180; Mechanical 13 "4" at -0.711,20.002 h0.61 r180